# Altium PCB Hobots-A-Coach-405.PcbDoc
Units mm, origin at the board's own origin, x right, y up, seen from the top; angles counter-clockwise.
Board outline 80 x 78 mm, 2 copper layers (Top Layer, Bottom Layer), stack 1.57 mm thick; 62 components, 102 nets, 296 pads, 249 vias.
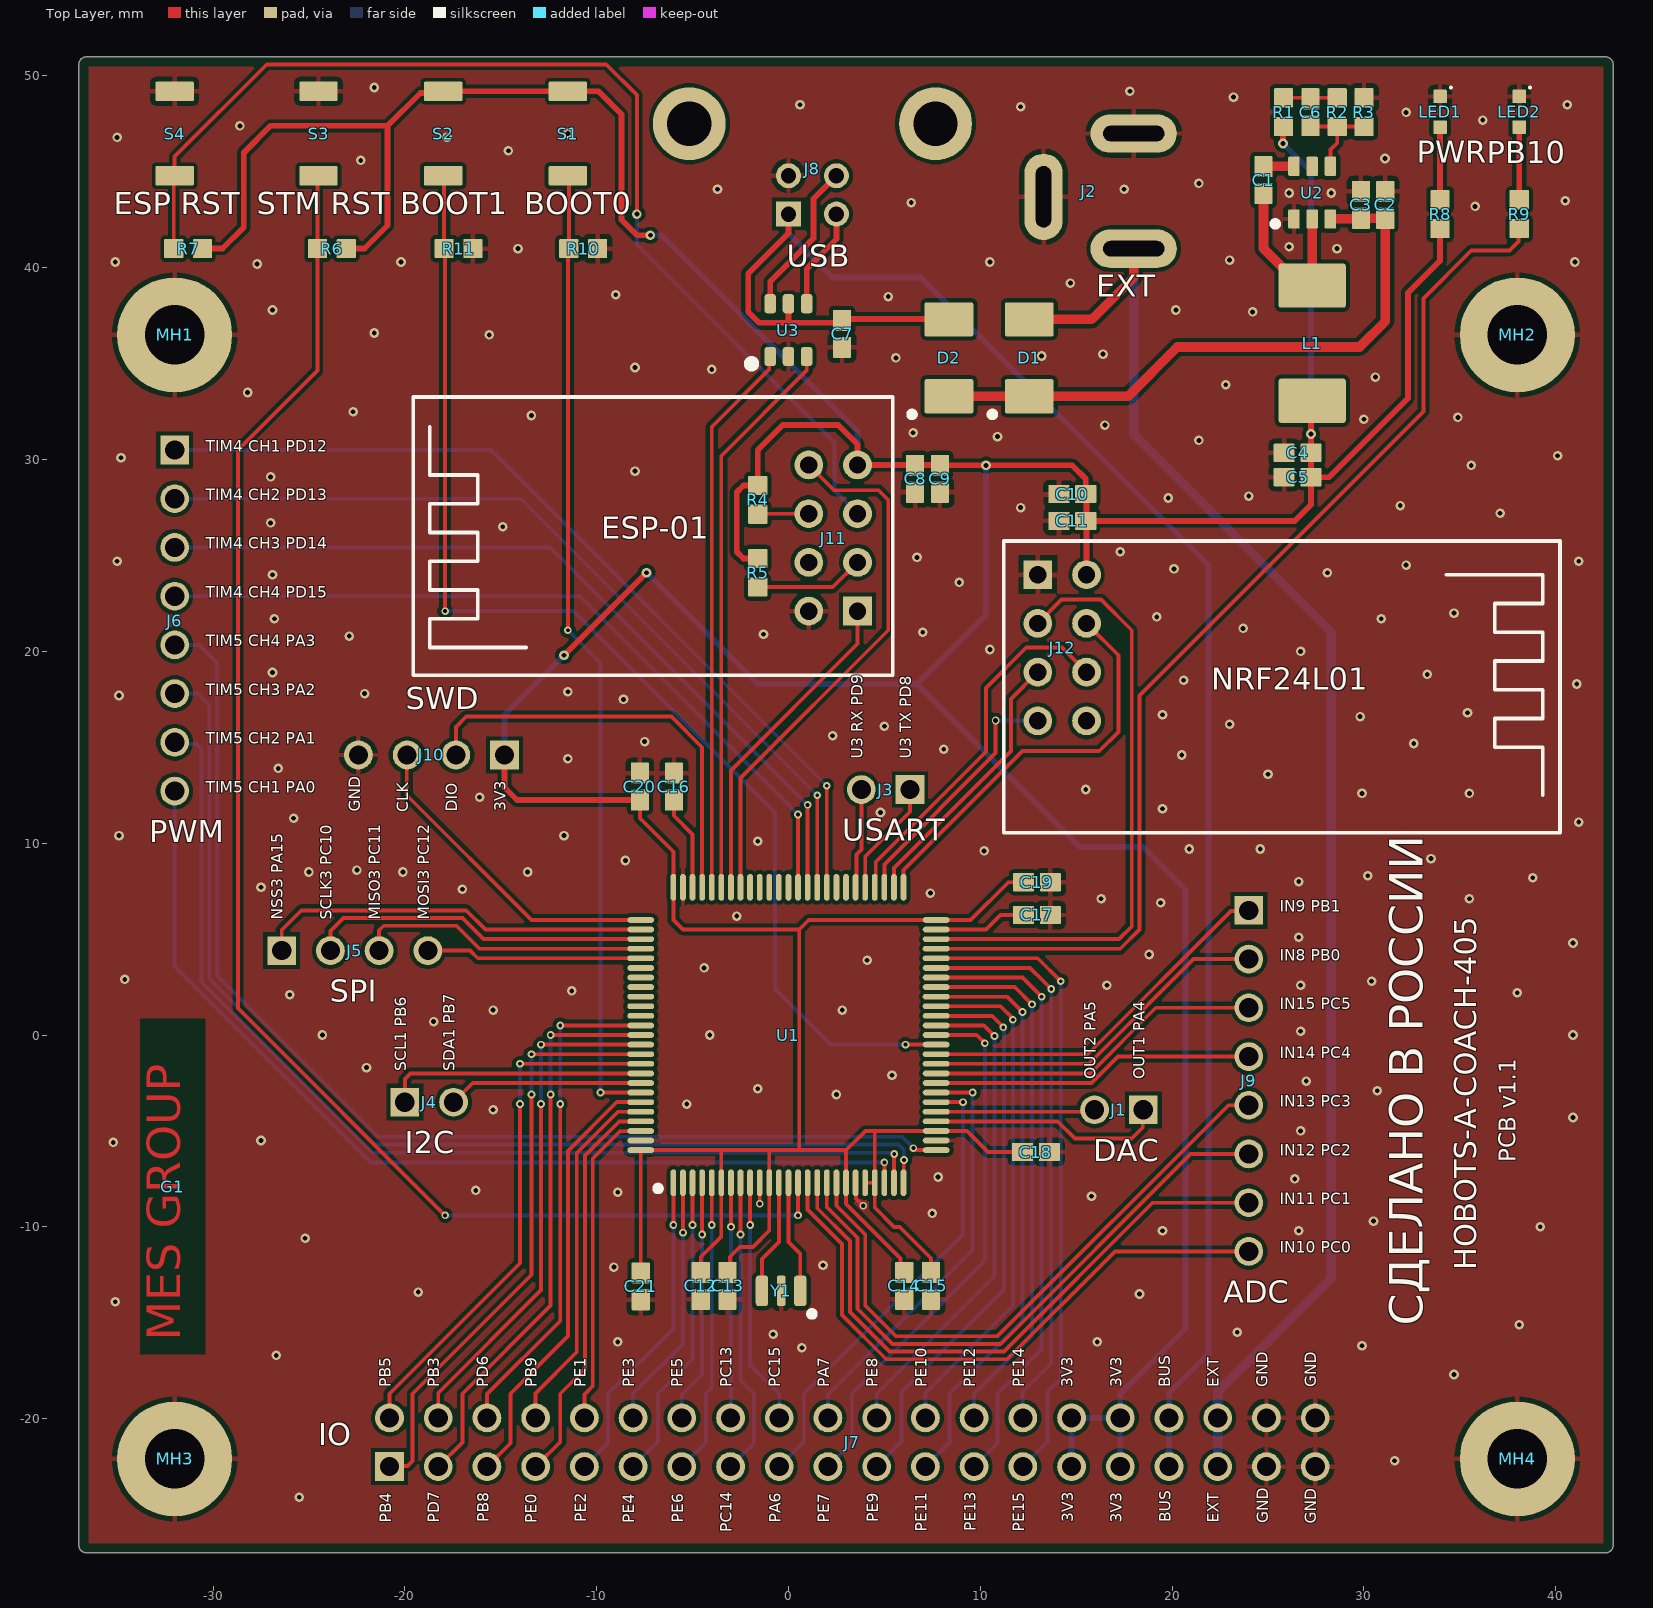
[diagram p0: Top Layer view]
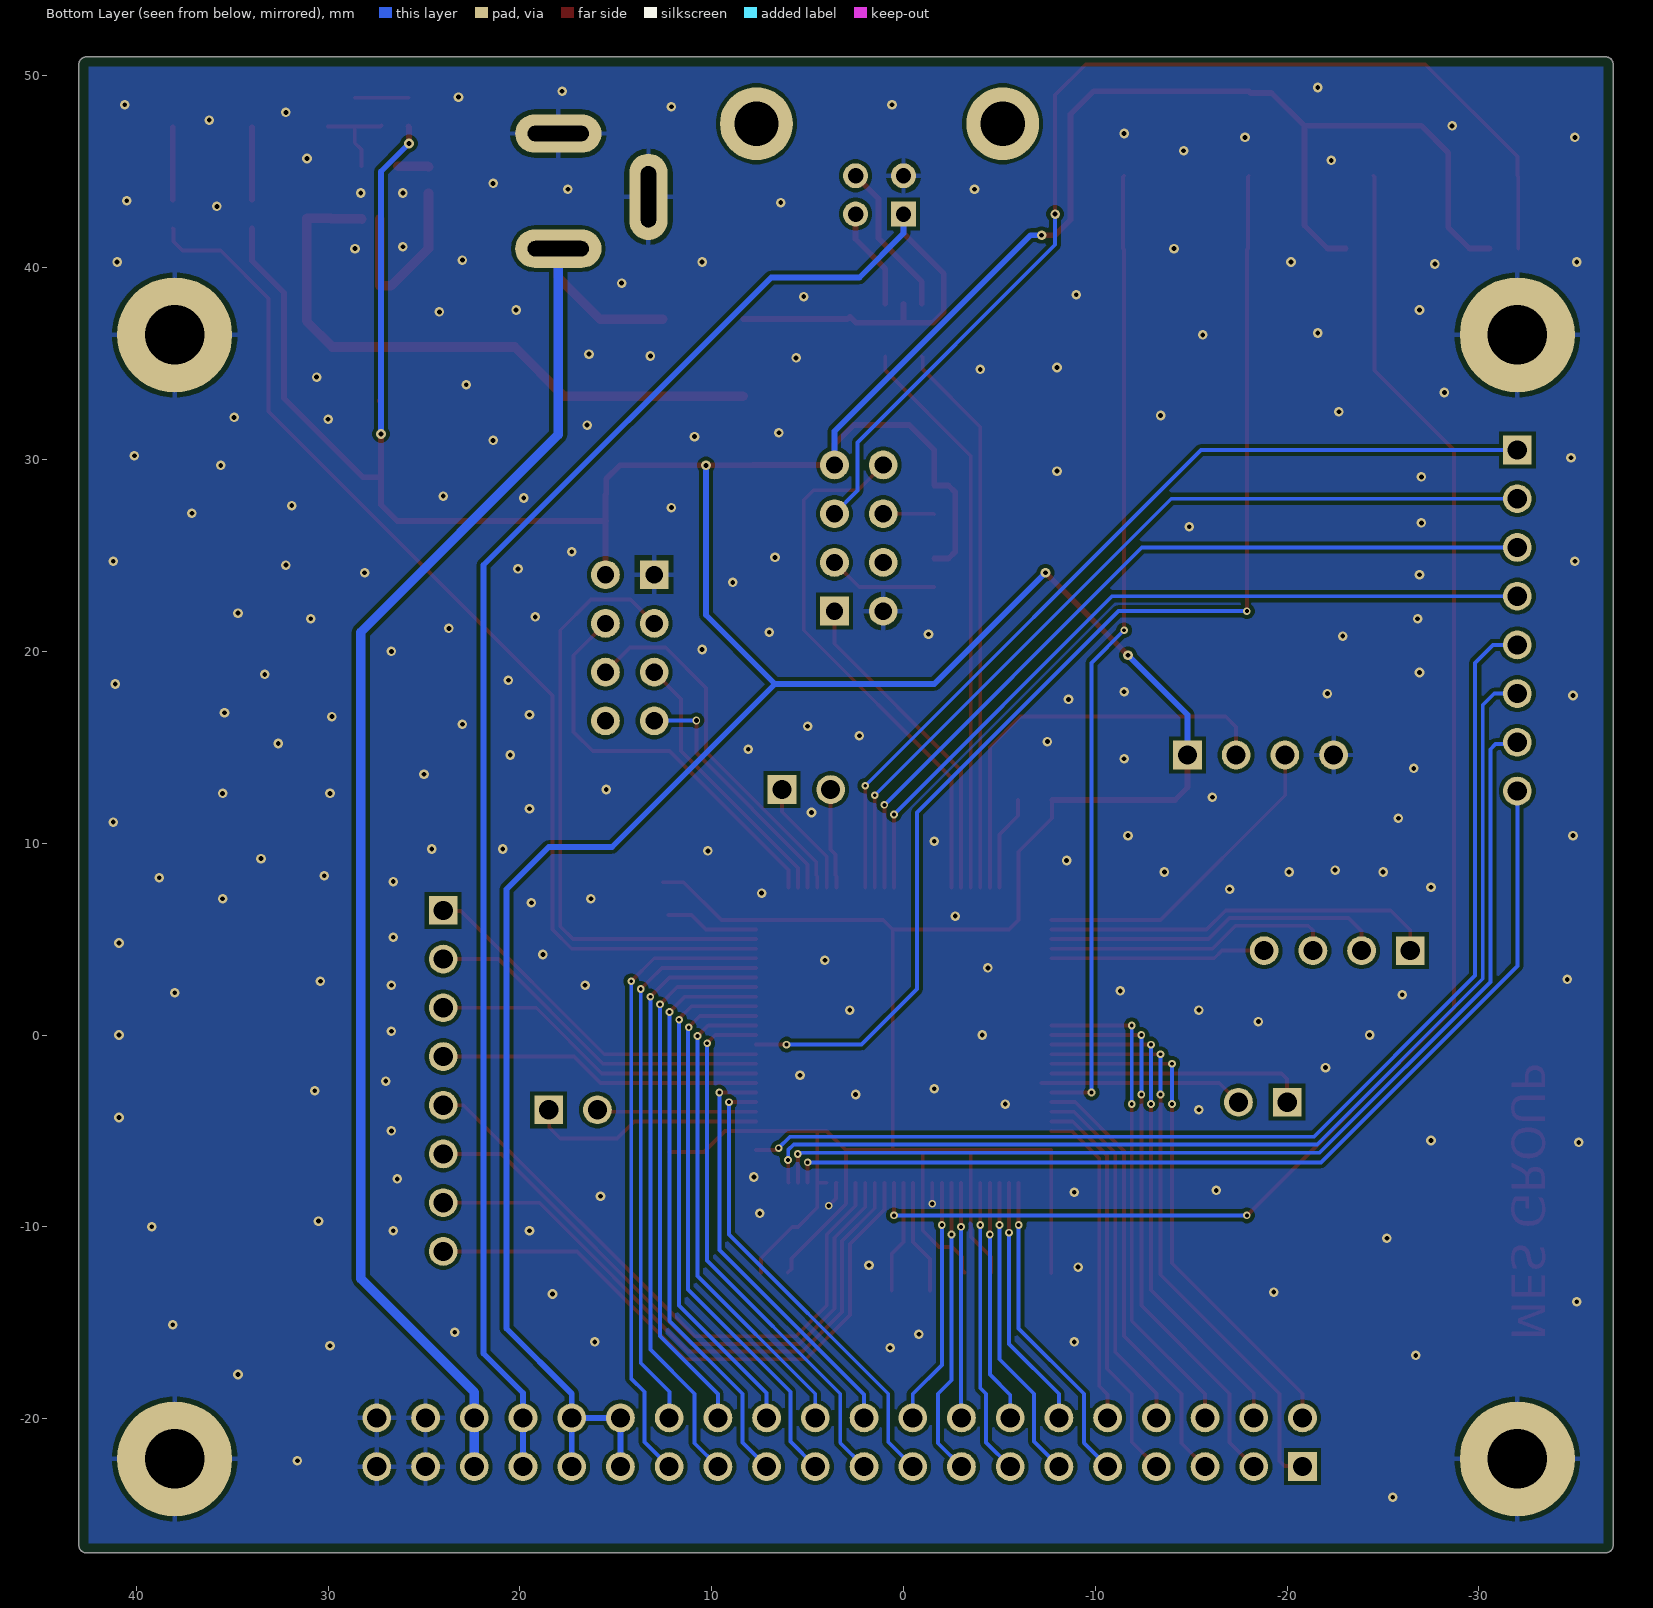
[diagram p1: Bottom Layer view, seen from below]
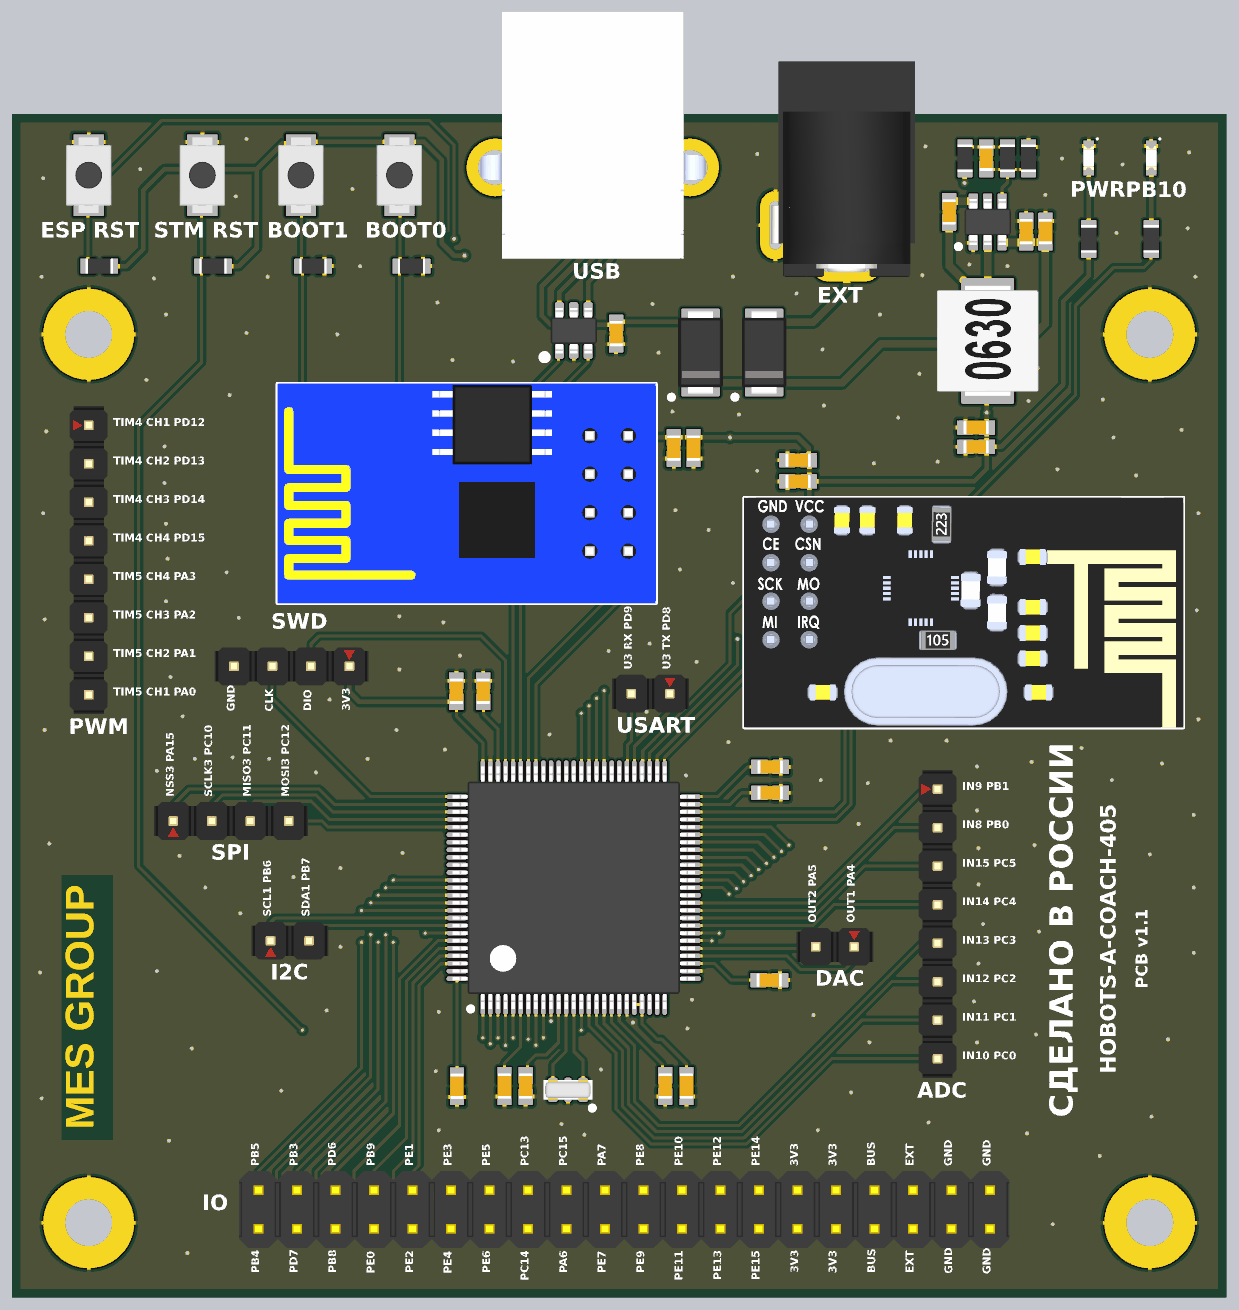
[diagram p2: 3D render of the assembled board from above, using the file's embedded part models]

## Layer stack, top to bottom
Top Solder: solder mask 0.01, Solder Resist, Dk 3.5
Top Layer: signal copper 0.035
Dielectric 1: dielectric 1.5, FR-4, Dk 4.8
Bottom Layer: signal copper 0.035
Bottom Solder: solder mask 0.01, Solder Resist, Dk 3.5

## Board outline
-37,-26.587 -37,50.59 cw(c-36.587,50.59) -36.587,51.002 -36.59,51 42.586,51 cw(c42.586,50.587) 42.999,50.587 43,50.586 43,-26.589 cw(c42.587,-26.589) 42.587,-27.001 42.588,-27 -36.587,-27 cw(c-36.587,-26.587)

## Design rules (kind name [scope] priority, off if disabled: settings)
BoardOutlineClearance [All] p1: gap=0.5 ignorepadtopadclearanceinfootprint=FALSE
Clearance [All] p1: gap=0.2 ignorepadtopadclearanceinfootprint=TRUE
PolygonConnect [All] p1: thpad.connectstyle=Relief thpad.reliefconductorwidth=0.254 thpad.reliefentries=4 thpad.polygonreliefangle="90 Angle" thpad.airgapwidth=0.254 smdpad.connectstyle=Relief smdpad.reliefconductorwidth=0.254 smdpad.reliefentries=4 smdpad.polygonreliefangle="90 Angle" smdpad.airgapwidth=0.254 via.connectstyle=Direct via.reliefconductorwidth=0.254 via.reliefentries=4 via.polygonreliefangle="90 Angle" via.airgapwidth=0.254
RoutingVias [All] p1: holewidth=0.25 width=0.5 viastyle="Through Hole" minholewidth=0.15 minwidth=0.3 maxholewidth=1 maxwidth=2
SolderMaskExpansion [All] p1: expansion=0.102 istentingtop=FALSE
Width [All] p1: maxlimit=1 minlimit=0.2 preferedwidth=0.3
30 further rules are at their usual default settings.

## Classes and differential pairs
component class Hobots-A-Coach-405: C1 C2 C3 C4 C5 C6 C7 C8 C9 C10 C11 C12 C13 C14 C15 C16 C17 C18 C19 C20 C21 D1 D2 G1 J1 J2 J3 J4 J5 J6 J7 J9 J11 L1 LED1 LED2 MH1 MH2 MH3 MH4 R1 R2 R3 R4 R5 R6 R8 S1 S2 S3 S4 U1 U2 U3 Y1

## Components (designator, comment, footprint, x,y, rotation, side; value= is the part's Value field where it differs from the comment)
C1 "CAP-100N" CAPC0603 24.765,44.577 r90 top
C2 "CAP-10U" CAPC0603 31.115,43.282 r270 top
C3 "CAP-100N" CAPC0603 29.845,43.282 r270 top
C4 "CAP-10U" CAPC0603 26.543,30.353 r0 top
C5 "CAP-100N" CAPC0603 26.543,29.083 r0 top
C6 "CAP-56P" CAPC0603 27.211,48.112 r90 top
C7 "CAP-100N" CAPC0603 2.794,36.551 r90 top
C8 "CAP-10U" CAPC0603 6.6,29 r90 top
C9 "CAP-100N" CAPC0603 7.9,29 r90 top
C10 "CAP-10U" CAPC0603 14.8,28.2 r0 top
C11 "CAP-100N" CAPC0603 14.8,26.8 r0 top
C12 "CAP-100N" CAPC0603 -4.572,-13.081 r90 top
C13 "CAP-100N" CAPC0603 -3.175,-13.081 r90 top
C14 "CAP-100N" CAPC0603 6.037,-13.081 r90 top
C15 "CAP-100N" CAPC0603 7.434,-13.081 r90 top
C16 "CAP-2U2" CAPC0603 -5.969,12.954 r270 top
C17 "CAP-2U2" CAPC0603 12.954,6.261 r180 top
C18 "CAP-100N" CAPC0603 12.9,-6.1 r180 top
C19 "CAP-100N" CAPC0603 12.954,7.966 r180 top
C20 "CAP-100N" CAPC0603 -7.747,12.954 r270 top
C21 "CAP-100N" CAPC0603 -7.7,-13.1 r90 top
D1 "SS34" DO-214AC(SMA) 12.557,35.306 r90 top
D2 "SS34" DO-214AC(SMA) 8.366,35.306 r90 top
G1 "MES Logo" MES_LOGO_COPPER_3MM -32.1,-7.9 r90 top
J1 "DAC" PLS-2 18.5,-3.9 r180 top locked
J2 "EXT" KLS1-DC-005 18,41 r0 top locked
J3 "USART" PLS-2 6.34,12.8 r180 top locked
J4 "I2C" PLS-2 -20,-3.5 r0 top locked
J5 "SPI" PLS-4 -26.42,4.4 r0 top locked
J6 "PWM" PLS-8 -32,30.5 r270 top locked
J7 "IO" PLD-40 -20.8,-22.5 r0 top locked
J8 "USB" U241-041N-1BR85-5 0,42.8 r90 top locked
J9 "ADC" PLS-8 24,6.5 r270 top locked
J10 "SWD" PLS-4 -14.8,14.6 r180 top locked
J11 "ESP-01" "ESP-01 Socket" 3.6,22.1 r90 top locked
J12 "NRF24L01" "NRF24L01+ Socket" 13,24 r270 top locked
L1 "AMPLF0630-100" AMPLF0630 27.305,36.068 r90 top
LED1 "PWR" LSM0603-Series 33.971,48.133 r270 top
LED2 "PB10" LSM0603-Series 38.1,48.133 r270 top
MH1 "TH-M3-D6-H3.1" TH-M3-D6-H3.1#1 -34.2,36.2 r0 top
MH2 "TH-M3-D6-H3.1" TH-M3-D6-H3.1#2 38.2,36.3 r0 top
MH3 "TH-M3-D6-H3.1" TH-M3-D6-H3.1#3 -30.2,-21.2 r0 top
MH4 "TH-M3-D6-H3.1" TH-M3-D6-H3.1#4 38.2,-22.1 r0 top
R1 "RES-49R9" RES0603 25.814,48.112 r270 top
R2 "RES-100K" RES0603 28.608,48.112 r90 top
R3 "RES-22K1" RES0603 30.005,48.112 r270 top
R4 "RES-10K" RES0603 -1.6,27.9 r270 top
R5 "RES-10K" RES0603 -1.6,24.1 r90 top
R6 "RES-10K" RES0603 -23.8,41 r0 top
R7 "RES-10K" RES0603 -31.3,41 r0 top
R8 "RES-1K" RES0603 33.971,42.799 r270 top
R9 "RES-1K" RES0603 38.1,42.799 r270 top
R10 "RES-10K" RES0603 -10.7,41 r180 top
R11 "RES-10K" RES0603 -17.2,41 r180 top
S1 "BOOT0" "Tactile Switch SMD 3x4x2-2p" -11.5,47 r90 top locked
S2 "BOOT1" "Tactile Switch SMD 3x4x2-2p" -18,47 r90 top locked
S3 "STM RST" "Tactile Switch SMD 3x4x2-2p" -24.5,47 r270 top locked
S4 "ESP RST" "Tactile Switch SMD 3x4x2-2p" -32,47 r270 top locked
U1 "STM32F405VGT6" LQFP-100-STM32 0,0 r90 top locked
U2 "TPS54202" SOT23-6-TI-TPS54202 27.305,43.917 r90 top
U3 "USBLC6-2SC6" SOT23-6L-STM 0,36.751 r90 top
Y1 "CSTCE8M00G55A-R0" MURATA_3213 -0.381,-13.335 r180 top

## Footprints (in the part's own frame and the unit in brackets; to place one, negate y for a bottom-side part, rotate by r counter-clockwise, add the part's x,y. Pads: shape width x height; smd on the part's side, far side on the other; paste and mask are expansions set on the pad)
AMPLF0630 [mm] "Shielded Large Current Power Inductor"
  rrect10% 2.3x3.5 smd: 1(-3,0) 2(3,0)
  body extent -3.65,-3.35 3.65,3.35, height 3.02
CAPC0603 [mm] "Chip Capacitor, 2-Leads, Body 1,60x0,80mm, IPC Medium Density"
  rrect10% 1.1x0.95 smd: 1(-0.7,0) 2(0.7,0)
  body extent -0.85,-0.45 0.85,0.45, height 0.9
DO-214AC(SMA) [mm]
  rrect10% 1.78x2.54 smd: 1(-2.005,0) 2(2.005,0)
  silkscreen extent -3.1,1.78 -2.8,2.07, body extent -2.8,-1.48 2.8,1.47, height 2.9
"ESP-01 Socket" [mm] "Socket for ESP8266 ESP-01"
  rect 1.5x1.5 hole 0.9: 1(0,0)
  round 1.5 hole 0.9: 2(0,2.54) 3(2.54,0) 4(2.54,2.54) 5(5.08,0) 6(5.08,2.54) 7(7.62,0) 8(7.62,2.54)
  silkscreen extent -3.34,-1.84 11.16,23.16, body extent -3.34,-1.84 11.16,23.16, height 14.4
KLS1-DC-005 [mm]
  oval 4.5x2 hole 0.8 slot 3.2 at 0 deg: 1(0,0) 2(0,6)
  oval 2x4.5 hole 0.8 slot 3.2 at 90 deg: 3(-4.7,2.7)
  body extent -4.95,-0.7 4.5,13.5, height 11
LQFP-100-STM32 [mm] "TSQFP, 100-Leads, Body 14,00x14,00mm, Pitch 0,50mm, IPC Medium Density"
  oval 1.4x0.3 smd: 1(-7.7,6) 2(-7.7,5.5) 3(-7.7,5) 4(-7.7,4.5) 5(-7.7,4) 6(-7.7,3.5) 7(-7.7,3) 8(-7.7,2.5) 9(-7.7,2) 10(-7.7,1.5) 11(-7.7,1) 12(-7.7,0.5) 13(-7.7,0) 14(-7.7,-0.5) 15(-7.7,-1) 16(-7.7,-1.5) 17(-7.7,-2) 18(-7.7,-2.5) 19(-7.7,-3) 20(-7.7,-3.5) 21(-7.7,-4) 22(-7.7,-4.5) 23(-7.7,-5) 24(-7.7,-5.5) 25(-7.7,-6) 51(7.7,-6) 52(7.7,-5.5) 53(7.7,-5) 54(7.7,-4.5) 55(7.7,-4) 56(7.7,-3.5) 57(7.7,-3) 58(7.7,-2.5) 59(7.7,-2) 60(7.7,-1.5) 61(7.7,-1) 62(7.7,-0.5) 63(7.7,0) 64(7.7,0.5) 65(7.7,1) 66(7.7,1.5) 67(7.7,2) 68(7.7,2.5) 69(7.7,3) 70(7.7,3.5) 71(7.7,4) 72(7.7,4.5) 73(7.7,5) 74(7.7,5.5) 75(7.7,6)
  oval 0.3x1.4 smd: 26(-6,-7.7) 27(-5.5,-7.7) 28(-5,-7.7) 29(-4.5,-7.7) 30(-4,-7.7) 31(-3.5,-7.7) 32(-3,-7.7) 33(-2.5,-7.7) 34(-2,-7.7) 35(-1.5,-7.7) 36(-1,-7.7) 37(-0.5,-7.7) 38(0,-7.7) 39(0.5,-7.7) 40(1,-7.7) 41(1.5,-7.7) 42(2,-7.7) 43(2.5,-7.7) 44(3,-7.7) 45(3.5,-7.7) 46(4,-7.7) 47(4.5,-7.7) 48(5,-7.7) 49(5.5,-7.7) 50(6,-7.7) 76(6,7.7) 77(5.5,7.7) 78(5,7.7) 79(4.5,7.7) 80(4,7.7) 81(3.5,7.7) 82(3,7.7) 83(2.5,7.7) 84(2,7.7) 85(1.5,7.7) 86(1,7.7) 87(0.5,7.7) 88(0,7.7) 89(-0.5,7.7) 90(-1,7.7) 91(-1.5,7.7) 92(-2,7.7) 93(-2.5,7.7) 94(-3,7.7) 95(-3.5,7.7) 96(-4,7.7) 97(-4.5,7.7) 98(-5,7.7) 99(-5.5,7.7) 100(-6,7.7)
  silkscreen extent -8.15,6.65 -7.85,6.95, body extent -8,-8 8,8, height 1.6
LSM0603-Series [mm] "LED 0603"
  rrect10% 0.7x0.7 smd: 1(-0.8,0) 2(0.8,0)
  silkscreen extent -1.31,0.51 -1.21,0.61, body extent -0.8,-0.35 0.8,0.35, height 0.7
MES_LOGO_COPPER_3MM [mm] "mes logo. size 3mm. copper layer. text inverted. solder mask open."
MURATA_3213 [mm]
  rrect50% 0.65x1.6 smd: 1(-1,0) 3(1,0)
  rrect50% 0.45x1.6 smd: 2(0,0)
  silkscreen extent -1.75,1.06 -1.45,1.35, body extent -1.6,-0.65 1.6,0.65, height 0.9
"NRF24L01+ Socket" [mm] "Socket for NRF24L01 / NRF24L01+"
  rect 1.5x1.5 hole 0.9: 1(0,0)
  round 1.5 hole 0.9: 2(0,2.54) 3(2.54,0) 4(2.54,2.54) 5(5.08,0) 6(5.08,2.54) 7(7.62,0) 8(7.62,2.54)
  silkscreen extent -1.75,-1.78 13.45,27.22, body extent -1.75,-1.78 13.45,27.22, height 15.95
PLD-40 [mm] "2 row, pitch 2.54mm"
  rect 1.5x1.5 hole 1: 1(0,0)
  round 1.5 hole 1: 2(0,2.54) 3(2.54,0) 4(2.54,2.54) 5(5.08,0) 6(5.08,2.54) 7(7.62,0) 8(7.62,2.54) 9(10.16,0) 10(10.16,2.54) 11(12.7,0) 12(12.7,2.54) 13(15.24,0) 14(15.24,2.54) 15(17.78,0) 16(17.78,2.54) 17(20.32,0) 18(20.32,2.54) 19(22.86,0) 20(22.86,2.54) 21(25.4,0) 22(25.4,2.54) 23(27.94,0) 24(27.94,2.54) 25(30.48,0) 26(30.48,2.54) 27(33.02,0) 28(33.02,2.54) 29(35.56,0) 30(35.56,2.54) 31(38.1,0) 32(38.1,2.54) 33(40.64,0) 34(40.64,2.54) 35(43.18,0) 36(43.18,2.54) 37(45.72,0) 38(45.72,2.54) 39(48.26,0) 40(48.26,2.54)
  body extent -1.27,-1.27 49.53,3.81, height 8.6
PLS-2 [mm] "pitch 2.54mm"
  rect 1.5x1.5 hole 1: 1(0,0)
  round 1.5 hole 1: 2(2.54,0)
  body extent -1.27,-1.25 3.81,1.25, height 8.55
PLS-4 [mm] "pitch 2.54mm"
  rect 1.5x1.5 hole 1: 1(0,0)
  round 1.5 hole 1: 2(2.54,0) 3(5.08,0) 4(7.62,0)
  body extent -1.27,-1.25 8.89,1.25, height 8.55
PLS-8 [mm] "pitch 2.54mm"
  rect 1.5x1.5 hole 1: 1(0,0)
  round 1.5 hole 1: 2(2.54,0) 3(5.08,0) 4(7.62,0) 5(10.16,0) 6(12.7,0) 7(15.24,0) 8(17.78,0)
  body extent -1.27,-1.25 19.05,1.25, height 8.55
RES0603 [mm] "Chip Resistor, 2-Leads, Body 1,60x0,80mm, IPC Medium Density"
  rrect10% 1x1 smd: 1(-0.75,0) 2(0.75,0)
  body extent -0.9,-0.5 0.9,0.5, height 0.55
SOT23-6-TI-TPS54202 [mm] "SOT23, 6-Leads, Body 2,90x2,80mm, Pitch 0,95mm, IPC Medium Density"
  rrect20% 1x0.6 smd: 1(-1.375,0.95) 2(-1.375,0) 3(-1.375,-0.95) 4(1.375,-0.95) 5(1.375,0) 6(1.375,0.95)
  silkscreen extent -1.78,1.78 -1.48,2.08, body extent -1.53,-1.53 1.53,1.53, height 1.1
SOT23-6L-STM [mm] "SOT23, 6-Leads, Body 2,93x2,80mm, Pitch 0,95mm, IPC Medium Density"
  rrect50% 1x0.6 smd: 1(-1.375,0.95) 2(-1.375,0) 3(-1.375,-0.95) 4(1.375,-0.95) 5(1.375,0) 6(1.375,0.95)
  silkscreen extent -1.96,1.73 -1.56,2.13, body extent -1.5,-1.53 1.5,1.53, height 1.45
"Tactile Switch SMD 3x4x2-2p" [mm]
  rrect10% 1x2 smd: 1(-2.2,0) 2(2.2,0)
  body extent -2.5,-1.5 2.5,1.5, height 1.93
TH-M3-D6-H3.1#1 [mm]
  round 6 hole 3.1 unplated: PTH(2.2,0.3)
TH-M3-D6-H3.1#2 [mm]
  round 6 hole 3.1 unplated: PTH(-0.2,0.2)
TH-M3-D6-H3.1#3 [mm]
  round 6 hole 3.1 unplated: PTH(-1.8,-0.9)
TH-M3-D6-H3.1#4 [mm]
  round 6 hole 3.1 unplated: PTH(-0.2,0)
U241-041N-1BR85-5 [mm] "Connector; USB2.0, Type B, Through-Hole; 4 Position; Right Angle"
  rect 1.3x1.3 hole 0.8: 1(0,0)
  round 1.3 hole 0.8: 2(0,-2.5) 3(2,-2.5) 4(2,0)
  round 3.8 hole 2.3: SH1(4.71,-7.67) SH2(4.71,5.17)
  body extent -1.31,-8.7 14.99,6.2, height 11.05

## Part data
C1 C3 C5 C7 C9 C11 C12 C13 C14 C15 C18 C19 C20 C21: "Chip Capacitor, 100 nF, +/- 5%", Capacitance="100 nF", Tolerance="5 %", Voltage Rating="50 V", Mount="Surface Mount", Type=Capacitor
C2 C4 C8 C10: "Chip Capacitor, 10 uF, +/- 5%", Capacitance="10 uF", Tolerance="5 %", Voltage Rating="50 V", Mount="Surface Mount", Type=Capacitor
C6: "Chip Capacitor, 56 pF, +/- 5%", Capacitance="56 pF", Tolerance="5 %", Voltage Rating="50 V", Mount="Surface Mount", Type=Capacitor
C16 C17: "Chip Capacitor, 2.2 uF, +/- 5", Capacitance="2.2 uF", Tolerance="5 %", Voltage Rating="50 V", Mount="Surface Mount", Type=Capacitor
D1 D2: "40V 3A Low forward voltage drop. High current capability Schottky Diode.", Mount="Surface Mount", PartNumber=SS34, Type="Schottky Diode"
G1: "Logotips MES GROUP"
J1 J3 J4: library part PLS-2, "pitch 2.54", Mount="Through Hole", PartNumber=PLS-2, Type=Connector
J2: library part KLS1-DC-005A-2.0, "5.5mm 2.0mm 2A 16V", Mount="Through Hole", PartNumber=KLS1-DC-005A-2.0, Type=Connector
J5: library part PLS-4, "pitch 2.54", Mount="Through Hole", PartNumber=PLS-4, Type=Connector
J6 J9: library part PLS-8, "pitch 2.54", Mount="Through Hole", PartNumber=PLS-8, Type=Connector
J7: library part PLD-40, "2 row, pitch 2.54", Mount="Through Hole", PartNumber=PLD-40, Type=Connector
J8: library part "USB-B U241-041N-1BR85-5", "USB - Type B Female USB 2 4 Through Hole USB Connectors", PartNumber=U241-041N-1BR85-5, Mount="Through Hole", Type=Connector
J10: library part SWD-PLS4, "STM SWD 4 pin", PartNumber=PLS-4, Mount="Through Hole", Type=Connector
J11: library part "ESP-01 Socket", "Socket for ESP8266 ESP-01 Connector PBD 8 pins 2x4 pitch 2.54", Mount="Through Hole", PartNumber=ESP-01, Type=Connector
J12: library part "NRF24L01+ Socket", "Socket for NRF24L01 / NRF24L01+ Connector PBD 8 pins 2x4 pitch 2.54", PartNumber=NRF24L01+, Mount="Through Hole", Type=Connector
L1: "Shielded Power Inductor 10μH ± 20%", DC Current=3.6A, Mount="Surface Mount", PartNumber=AMPLF0630-100, Type=Inductor
LED1: library part LSM0603412V, "Red LED 0603 2V 20mA", Color=Red, Mount="Surface Mount", PartNumber=LSM0603412V, Type=LED
LED2: library part LSM0603453V, "Green LED 0603 3V 20mA", Color=Green, Mount="Surface Mount", PartNumber=LSM0603453V, Type=LED
R1: "Chip Resistor, 49.9 Ohm, +/- 1%", Resistance="49.9 Ohm", Tolerance="1 %", Voltage Rating="50 V", Mount="Surface Mount", Type=Resistor
R2: "Chip Resistor, 100 KOhm, +/- 1%", Resistance="100 KOhm", Tolerance="1 %", Voltage Rating="50 V", Mount="Surface Mount", Type=Resistor
R3: "Chip Resistor, 22.1 KOhm, +/- 1%", Resistance="22.1 KOhm", Tolerance="1 %", Voltage Rating="50 V", Mount="Surface Mount", Type=Resistor
R4 R5 R6 R7 R10 R11: "Chip Resistor, 10 KOhm, +/- 1%", Resistance="10 KOhm", Tolerance="1 %", Voltage Rating="50 V", Mount="Surface Mount", Type=Resistor
R8 R9: "Chip Resistor, 1 KOhm, +/- 1%", Resistance="1 KOhm", Tolerance="1 %", Voltage Rating="50 V", Mount="Surface Mount", Type=Resistor
S1 S2 S3 S4: library part "Tactile Switch 2P 3x4x2", "2-Pin SMD Tactile Switch, sunrom 3x4x2mm 12V DC 0.2A", Model=3x4x2mm-2P, Mount="Surface Mount", Type="Tactile Switch"
U1: "1024 KB Flash 192 RAM 168 MHz ARM based 32-bit MCU", Digit="32 bit", Mount="Surface Mount", PartNumber=STM32F405VGT6, Type=Microcontroller
U2: "4.5-V to 28-V Input, 2-A Output, EMI Friendly / Synchronous Step Down Converter", Package=SOT23-6, Mount="Surface Mount", PartNumber=TPS54202, Type="Step-Down DC-DC"
U3: "Very low capacitance ESD protection  3.5 pF max. USB 2.0 ports up to 480 Mb/s. Ethernet port: 10/100 Mb/s.  SIM card protection", ESD="25 kV", Mount="Surface Mount", PartNumber=USBLC6-2SC6, Type="TVS Diode"
Y1: "8MHz ±0.5% 33pF 40 Ohm(Max) SMDCrystal Resonators", Frequency=8MHz, LoadCapacitance="33 pF", Mount="Surface Mount", PartNumber=CSTCE8M00G55A-R0, Type="Quartz Crystal Resonator"

## Via types
v1: diameter 0.5, hole 0.25, Top Layer to Bottom Layer, tented both sides, 203 vias
v2: diameter 0.4, hole 0.2, Top Layer to Bottom Layer, tented both sides, 43 vias
v3: diameter 0.4, hole 0.25, Top Layer to Bottom Layer, tented both sides, 3 vias

## Nets (pads, with @x,y where several pads share a name; then routed paths per layer and width w, separated by ;. In a path a pad name is that pad's centre, name@x,y a point inside that pad or via, vN(x,y) a via of type N, cw(c..) or ccw(c..) an arc to the next point about the centre after c; other vN are vias at no path point)
ESP_RST: J11.5 R7.1 S4.2 | length 58.2
  Top Layer w0.2: R7.1 -32.05,44.75 S4.2 -32,45.8 -27.2,50.6 -9.5,50.6 -7.9,49 v1(-7.9,42.8)
  Bottom Layer w0.2: v1(-7.9,42.8) -7.9,41.2 2.4,30.9 2.4,28.38 J11.5
GND: C2.1 C3.1 C4.1 C5.1 C7.1 C8.1 C9.1 C10.1 C11.1 C12.1 C13.1 C14.1 C15.1 C16.1 C17.1 C18.1 C19.1 C20.1 C21.1 J2.2 J2.3 J7.37 J7.38 J7.39 J7.40 J8.4 J10.4 J11.2 J12.1 LED1.1 LED2.1 MH1.PTH MH2.PTH MH3.PTH MH4.PTH R3.1 R10.1 R11.1 S3.1 S4.1 U1.10 U1.20 U1.27 U1.74 U1.99 U2.1 U3.2 Y1.2 | length 2.5
  Top Layer w0.2: v3(-1.5,-8.8) U1.10 ; U1.20 3.519,-7.719 3.519,-8.519 v3(3.9,-8.9)
  other v1: -25.5,-24.1 31.6,-22.2 34.7,-17.7 -26.7,-16.7 0.7,-16.3 29.9,-16.2 -8.9,-16 16.1,-16 -0.8,-15.6 23.4,-15.5 38.1,-15.1 -35.1,-13.9 18.3,-13.5 -19.3,-13.4 -9.1,-12.1 1.8,-12 -25.2,-10.6 19.5,-10.2 26.6,-10.2 39.2,-10 30.5,-9.7 7.5,-9.3 15.8,-8.4 -8.9,-8.2 -16.3,-8.1 26.4,-7.5 7.8,-7.4 -35.2,-5.6 -27.5,-5.5 26.7,-5 40.9,-4.3 -15.4,-3.9 -5.3,-3.6 2.5,-3.1 30.7,-2.9 -1.6,-2.8 27,-2.4 5.4,-2.1 -22,-1.7 -24.3,0 -4.1,0 40.9,0 26.7,0.2 -18.5,0.7 -15.4,1.3 2.8,1.3 -26,2.1 38,2.2 -11.3,2.3 16.6,2.6 26.7,2.6 30.4,2.8 -34.6,2.9 -4.4,3.5 4.1,3.9 18.8,4.2 40.9,4.8 26.6,5.1 -2.7,6.2 19.4,6.9 16.3,7.1 35.5,7.1 7.4,7.4 -17,7.6 -27.5,7.7 26.6,8 38.8,8.2 30.2,8.3 -25,8.5 -20.1,8.5 -13.6,8.5 -22.5,8.6 -8.5,9.1 33.5,9.2 10.2,9.6 20.9,9.7 24.6,9.7 -1.6,10.1 -34.9,10.4 -11.7,10.4 41.2,11.1 -25.8,11.3 4.8,11.6 19.5,11.8 -16.1,12.4 29.9,12.6 35.5,12.6 15.5,12.8 25,13.6 -26.6,13.9 -11.5,14.4 20.5,14.6 8.1,14.9 32.6,15.2 -7.5,15.3 2.3,15.6 5,16.1 23,16.2 29.8,16.6 19.5,16.7 35.4,16.8 -8.6,17.5 -34.9,17.7 -22.1,17.8 -11.5,17.9 41.1,18.3 20.6,18.5 33.3,18.8 -26.9,18.9 26.7,20 10.5,20.1 -22.9,20.8 -1.3,20.9 7,21 23.7,21.2 -26.8,21.7 30.9,21.7 19.2,21.8 34.7,22 8.9,23.6 -26.9,24 28.1,24.1 20.1,24.3 32.2,24.5 -35,24.7 41.2,24.7 6.7,24.9 17.3,25.2 -14.9,26.5 -27,26.7 37.1,27.2 12.1,27.5 31.9,27.6 19.8,28 24,28.1 -27,29.1 -8,29.4 35.6,29.7 -34.8,30.1 40.1,30.2 21.4,31 10.9,31.2 6.5,31.4 16.5,31.8 30,32.1 34.9,32.2 -13.4,32.3 -22.7,32.5 -28.2,33.5 22.8,33.9 30.6,34.3 -4,34.7 -8,34.8 5.6,35.3 13.2,35.4 16.4,35.5 -15.6,36.5 -21.6,36.6 24.2,37.7 -26.9,37.8 20.2,37.8 5.2,38.5 -9,38.6 14.7,39.2 -27.7,40.2 -35.1,40.3 -20.2,40.3 10.5,40.3 41,40.3 23,40.4 -14.1,41 28.6,41 26.1,41.1 35.8,43.2 6.4,43.4 40.5,43.5 26.1,43.9 28.3,43.9 -3.7,44.1 17.5,44.1 21.4,44.4 -22.3,45.6 31.1,45.7 -14.6,46.1 -35,46.8 -17.8,46.8 -11.5,47 -28.6,47.4 36.2,47.7 32.2,48.1 12.1,48.4 0.6,48.5 40.6,48.5 23.2,48.9 17.8,49.2 -21.6,49.4
NetC6_2: C6.2 R1.1 R2.2 | length 2.8
  Top Layer w0.2: R1.1 R2.2
NetJ11_3: J11.3 R5.1 | length 5.7
  Top Layer w0.2: R5.1 2.31,23.35 J11.3
NetJ11_6: J11.6 R4.2 | length 2.7
  Top Layer w0.2: R4.2 -1.57,27.18 J11.6
NetLED1_2: LED1.2 R8.1 | length 3.8
  Top Layer w0.3: R8.1 LED1.2
NetLED2_2: LED2.2 R9.1 | length 3.8
  Top Layer w0.3: R9.1 LED2.2
PP_3V3: C4.2 C5.2 C8.2 C9.2 C10.2 C11.2 C12.2 C13.2 C14.2 C15.2 C18.2 C19.2 C20.2 C21.2 J7.29 J7.30 J7.31 J7.32 J10.1 J11.7 J12.2 L1.1 R1.2 R4.1 R5.2 R6.2 R7.2 R8.2 S1.2 S2.2 U1.6 U1.11 U1.19 U1.21 U1.22 U1.28 U1.50 U1.75 U1.100 | length 345.2
  Top Layer w0.2: C20.2 -7.747,11.303 -6,9.556 U1.75 -6,6 -5.5,5.5 0.561,5.5 ; C21.2 U1.100 -3.5,-6 ; C12.2 -4.572,-11.572 -3.5,-10.5 U1.6 -3.5,-6 ; C13.2 -3.048,-12.254 -3.048,-11.557 -2.536,-11.045 -1.845,-11.045 -1,-10.2 U1.11 -1,-6 ; U1.21 U1.22 ; C14.2 5.848,-12.192 5.848,-11.648 3,-8.8 U1.19 3,-6.017 3.017,-6 ; C15.2 7.434,-11.634 5.8,-10 5.5,-10 4.5,-9 U1.22 ; C18.2 10.4,-6.1 9.3,-5 U1.28 4.546,-5 ; C19.2@12.54,7.966 C19.2 11.466,7.966 9.5,6 U1.50 1.061,6 0.561,5.5 ; -3.5,-6 -1,-6 ; -1,-6 0.561,-6 ; 0.561,-6 3.017,-6 ; 0.561,-6 0.561,5.5 ; 3.017,-6 4.017,-5 4.546,-5 ; U1.22 4.5,-5.046 4.546,-5
  Top Layer w0.3: R7.2 -29.5,41 -28.4,42.1 -28.4,46 -27,47.4 -20.9,47.4 ; R6.2 -22.1,41 -20.9,42.2 -20.9,47.4 ; J10.1 -14.8,12.9 -14.154,12.254 C20.2 ; v1(-11.7,19.8) v1(-7.4,24.1) ; v1(-7.2,41.7) -7.9,41.7 -8.7,42.5 -8.7,48 -9.9,49.2 S1.2 S2.2 -18.083,49.117 -19.183,49.117 -20.9,47.4 ; R5.2 -2.35,24.85 -2.7,25.2 -2.7,28.3 -2.35,28.65 R4.1 -1.6,30.5 -0.3,31.8 2.6,31.8 3.6,30.8 J11.7 7.88,29.72 C9.2 v1(10.3,29.7) 14.8,29.7 15.5,29 C10.2 15.54,28.16 C11.2@15.54,26.8 ; C11.2 C11.2@15.54,26.8 ; J12.2 C11.2@15.54,26.8 ; v1(25.781,46.482) 25.781,47.328 R1.2 ; L1.1 27.243,33.006 v1(27.243,31.334) C4.2 C5.2 ; R8.2 33.971,40.371 32.3,38.7 32.3,33.2 28.183,29.083 C5.2 ; C11.2@15.54,26.8 26.4,26.8 27.243,27.643 C5.2
  Bottom Layer w0.3: J10.1 -14.8,16.7 v1(-11.7,19.8) ; v1(-7.4,24.1) -1.6,18.3 6.7,18.3 ; v1(-7.2,41.7) -6.624,41.7 3.6,31.476 J11.7 ; v1(10.3,29.7) 10.3,21.9 6.7,18.3 ; J7.29 J7.30 J7.32 ; J7.31 J7.32 ; v1(25.781,46.482) 27.243,45.02 v1(27.243,31.334) ; 6.7,18.3 15.2,9.8 18.5,9.8 20.7,7.6 20.7,-15.3 17.3,-18.7 J7.32
PP_EXT_IN: D1.2 J2.1 J7.35 J7.36 | length 78.1
  Top Layer w0.5: D1.2 15.811,37.311 18,39.5 J2.1
  Bottom Layer w0.5: J2.1 18,31.3 28.3,21 28.3,-12.7 22.38,-18.62 J7.35
PP_VBUS: C7.2 D2.2 J7.33 J7.34 J8.1 U3.5 | length 95.8
  Top Layer w0.3: U3.5 0,37.132 ; J8.1 0,41.8 -2.1,39.7 -2.1,37.7 -1.532,37.132 0,37.132 ; D2.2@8.357,37.311 8.344,37.324 2.921,37.324 2.794,37.451 2.475,37.132 0,37.132
  Bottom Layer w0.3: J8.1 0,41.8 2.3,39.5 6.9,39.5 21.9,24.5 21.9,-16.6 19.84,-18.66 J7.34 J7.33
PP_VCC_IN: C2.2 C3.2 D1.1 D2.1 U2.3 | length 32.6
  Top Layer w0.5: D2.1 D1.1 17.701,33.301 20.27,35.87 29.774,35.87 31.115,37.211 C2.2 C3.2 29.825,42.562 28.275,42.562 U2.3
STM_ADC12_IN8_PB0: J9.2 U1.35 | length 18.6
  Top Layer w0.2: U1.35 15.666,-1.5 21.126,3.96 J9.2
STM_ADC12_IN9_PB1: J9.1 U1.36 | length 19.4
  Top Layer w0.2: U1.36 15.6,-1 23.067,6.467 23.967,6.467 J9.1
STM_ADC12_IN14_PC4: J9.4 U1.33 | length 16.9
  Top Layer w0.2: U1.33 15.8,-2.5 17.18,-1.12 J9.4
STM_ADC12_IN15_PC5: J9.3 U1.34 | length 17.7
  Top Layer w0.2: U1.34 15.731,-2 19.151,1.42 J9.3
STM_ADC123_IN10_PC0: J9.8 U1.15 | length 32.1
  Top Layer w0.2: U1.15 1,-9.1 2.8,-10.9 2.8,-14.6 5.1,-16.9 11.4,-16.9 17.02,-11.28 J9.8
STM_ADC123_IN11_PC1: J9.7 U1.16 | length 32.3
  Top Layer w0.2: U1.16 1.5,-9.034 3.2,-10.734 3.2,-14.434 5.266,-16.5 11.234,-16.5 18.994,-8.74 J9.7
STM_ADC123_IN12_PC2: J9.6 U1.17 | length 32.5
  Top Layer w0.2: U1.17 2,-8.969 3.6,-10.569 3.6,-14.269 5.431,-16.1 11.069,-16.1 20.969,-6.2 J9.6
STM_ADC123_IN13_PC3: J9.5 U1.18 | length 32.7
  Top Layer w0.2: U1.18 2.5,-8.903 4,-10.403 4,-14.103 5.597,-15.7 10.9,-15.7 22.94,-3.66 J9.5
STM_BOOT0: R10.2 S1.1 U1.94 | length 50.6
  Top Layer w0.2: v2(-11.5,21.1) -11.5,40.95 R10.2 -11.45,44.75 S1.1 ; v2(-9.8,-3) U1.94
  Bottom Layer w0.2: v2(-11.5,21.1) -9.8,19.4 v2(-9.8,-3)
STM_DAC_OUT1_PA4: J1.1 U1.29 | length 12.3
  Top Layer w0.2: U1.29 14.04,-4.5 14.94,-5.4 17.9,-5.4 18.467,-4.833 18.467,-3.933 J1.1
STM_DAC_OUT2_PA5: J1.2 U1.30 | length 8.3
  Top Layer w0.2: U1.30 15.86,-4 J1.2
STM_I2C1_SCL_PB6: J4.1 U1.92 | length 13.6
  Top Layer w0.2: J4.1 -20,-2.3 -19.7,-2 U1.92
STM_I2C1_SDA_PB7: J4.2 U1.93 | length 10.7
  Top Layer w0.2: J4.2 -16.46,-2.5 U1.93 U1.93@-7.2,-2.5
STM_NRF_CE_PB11: J12.3 U1.48 | length 32
  Top Layer w0.2: U1.48 17.234,5 17.9,5.666 17.9,21.1 16.3,22.7 14.24,22.7 J12.3
STM_NRST: R6.1 S3.2 U1.14 | length 80.5
  Top Layer w0.2: S3.2 -24.55,44.75 R6.1 -24.55,34.65 -28.7,30.5 -28.7,1.4 v2(-17.9,-9.4) ; v2(0.5,-9.4) U1.14
  Bottom Layer w0.2: v2(-17.9,-9.4) v2(0.5,-9.4)
STM_OSC_IN_PH0: U1.12 Y1.3 | length 6
  Top Layer w0.2: Y1.3 -1.381,-11.668 -0.5,-10.787 U1.12
STM_OSC_OUT_PH1: U1.13 Y1.1 | length 5.9
  Top Layer w0.2: U1.13 0,-10.795 0.619,-11.414 Y1.1
STM_PA6: J7.17 U1.31 | length 24.4
  Top Layer w0.2: U1.31 v2(9.1,-3.5)
  Bottom Layer w0.2: J7.17 0.8,-21.22 0.8,-18.7 9.1,-10.4 v2(9.1,-3.5)
STM_PA7: J7.20 U1.32 | length 22
  Top Layer w0.2: U1.32 v2(9.6,-3)
  Bottom Layer w0.2: J7.20 2.06,-18.74 9.6,-11.2 v2(9.6,-3)
STM_PA8: U1.67
STM_PB2_BOOT1: R11.2 S2.1 U1.37 | length 63.1
  Top Layer w0.2: S2.1 -17.95,44.75 R11.2 -17.9,40.95 v2(-17.9,22.1) ; v2(6.1,-0.5) U1.37
  Bottom Layer w0.2: v2(-17.9,22.1) -11.2,22.1 -0.7,11.6 -0.7,2.4 2.2,-0.5 v2(6.1,-0.5)
STM_PB3: J7.4 U1.89 | length 26.9
  Top Layer w0.2: J7.4 -18.26,-18.66 -12.9,-13.3 v2(-12.9,-3.6) ; v2(-12.9,-0.5) U1.89
  Bottom Layer w0.2: v2(-12.9,-3.6) v2(-12.9,-0.5)
STM_PB4: J7.1 U1.90 | length 30.8
  Top Layer w0.2: J7.1 -20.767,-22.467 -19.867,-22.467 -19.6,-22.2 -19.6,-18.7 -13.4,-12.5 v2(-13.4,-3.1) ; v2(-13.4,-1) U1.90
  Bottom Layer w0.2: v2(-13.4,-3.1) v2(-13.4,-1)
STM_PB5: J7.2 U1.91 | length 27.6
  Top Layer w0.2: J7.2 -20.8,-18.7 -14,-11.9 v2(-14,-3.6) ; v2(-14,-1.5) U1.91
  Bottom Layer w0.2: v2(-14,-3.6) v2(-14,-1.5)
STM_PB8: J7.5 U1.95 | length 23.1
  Top Layer w0.2: J7.5 -14.5,-21.28 -14.5,-18.7 -11.5,-15.7 -11.5,-6.047 -8.953,-3.5 U1.95
STM_PB9: J7.8 U1.96 | length 18.9
  Top Layer w0.2: J7.8 -13.18,-18.68 -11.034,-16.534 -11.034,-6.146 -8.888,-4 U1.96
STM_PB10: R9.2 U1.47 | length 56.9
  Top Layer w0.2: U1.47 17.3,4.5 18.3,5.5 18.3,17.7 33.1,32.5 33.1,38.4 35.6,40.9 37.6,40.9 38.066,41.366 38.066,42.015 R9.2
STM_PC6: U1.63
STM_PC7: U1.64
STM_PC8: U1.65
STM_PC9: U1.66
STM_PC13: J7.16 U1.7 | length 12.3
  Top Layer w0.2: v2(-3,-10) U1.7
  Bottom Layer w0.2: J7.16 -3,-19.94 v2(-3,-10)
STM_PC14: J7.15 U1.8 | length 15.6
  Top Layer w0.2: v2(-2.5,-10.4) U1.8
  Bottom Layer w0.2: J7.15 -1.8,-21.28 -1.8,-18.7 -2.5,-18 v2(-2.5,-10.4)
STM_PC15: J7.18 U1.9 | length 12.9
  Top Layer w0.2: v2(-2,-9.9) U1.9
  Bottom Layer w0.2: v2(-2,-9.9) -2,-17.2 -0.48,-18.72 J7.18
STM_PD0: U1.81
STM_PD1: U1.82
STM_PD2: U1.83
STM_PD3: U1.84
STM_PD4: U1.85
STM_PD5: U1.86
STM_PD6: J7.6 U1.87 | length 26.2
  Top Layer w0.2: J7.6 -15.72,-18.72 -11.9,-14.9 v2(-11.9,-3.6) ; v2(-11.9,0.5) U1.87
  Bottom Layer w0.2: v2(-11.9,-3.6) v2(-11.9,0.5)
STM_PD7: J7.3 U1.88 | length 29.6
  Top Layer w0.2: J7.3 -17,-21.24 -17,-18.7 -12.4,-14.1 v2(-12.4,-3.1) ; v2(-12.4,0) U1.88
  Bottom Layer w0.2: v2(-12.4,-3.1) v2(-12.4,0)
STM_PD10: U1.57
STM_PD11: U1.58
STM_PE0: J7.7 U1.97 | length 20.9
  Top Layer w0.2: J7.7 -11.9,-21.22 -11.9,-18.7 -10.6,-17.4 -10.6,-6.278 -8.822,-4.5 U1.97
STM_PE1: J7.10 U1.98 | length 16.8
  Top Layer w0.2: J7.10 -10.64,-18.74 -10.2,-18.3 -10.2,-6.444 -8.775,-5.019 -7.719,-5.019 U1.98
STM_PE2: J7.9 U1.1 | length 16.7
  Top Layer w0.2: v2(-6,-9.9) U1.1
  Bottom Layer w0.2: J7.9 -9.4,-21.26 -9.4,-18.7 -6,-15.3 v2(-6,-9.9)
STM_PE3: J7.12 U1.2 | length 13.3
  Top Layer w0.2: v2(-5.5,-10.3) U1.2
  Bottom Layer w0.2: J7.12 -8.1,-18.7 -5.5,-16.1 v2(-5.5,-10.3)
STM_PE4: J7.11 U1.3 | length 16.1
  Top Layer w0.2: v2(-5,-9.9) U1.3
  Bottom Layer w0.2: J7.11 -6.8,-21.2 -6.8,-18.7 -5,-16.9 v2(-5,-9.9)
STM_PE5: J7.14 U1.4 | length 12.7
  Top Layer w0.2: v2(-4.5,-10.4) U1.4
  Bottom Layer w0.2: J7.14 -5.56,-18.76 -4.5,-17.7 v2(-4.5,-10.4)
STM_PE6: J7.13 U1.5 | length 15.4
  Top Layer w0.2: v2(-4,-9.9) U1.5
  Bottom Layer w0.2: J7.13 -4.3,-21.24 -4.3,-18.7 -4,-18.4 v2(-4,-9.9)
STM_PE7: J7.19 U1.38 | length 28.2
  Top Layer w0.2: U1.38 9.815,0 v2(10.238,-0.425) v2(10.238,-0.425)
  Bottom Layer w0.2: J7.19 3.3,-21.26 3.3,-18.7 10.238,-11.762 v2(10.238,-0.425)
STM_PE8: J7.22 U1.39 | length 25.7
  Top Layer w0.2: U1.39 10.186,0.5 v2(10.738,-0.053)
  Bottom Layer w0.2: J7.22 4.6,-18.7 10.738,-12.562 v2(10.738,-0.053)
STM_PE9: J7.21 U1.40 | length 29.4
  Top Layer w0.2: U1.40 10.623,1 11.2,0.423 v2(11.2,0.4)
  Bottom Layer w0.2: J7.21 5.9,-21.2 5.9,-18.6 11.238,-13.262 11.238,0.362 v2(11.2,0.4)
STM_PE10: J7.24 U1.41 | length 27
  Top Layer w0.2: U1.41 11.054,1.5 11.7,0.854 v2(11.7,0.8)
  Bottom Layer w0.2: J7.24 7.14,-18.66 11.7,-14.1 v2(11.7,0.8)
STM_PE11: J7.23 U1.42 | length 30.6
  Top Layer w0.2: U1.42 11.4,2 v2(12.2,1.2)
  Bottom Layer w0.2: J7.23 8.4,-21.24 8.4,-18.7 12.2,-14.9 v2(12.2,1.2)
STM_PE12: J7.26 U1.43 | length 28.2
  Top Layer w0.2: U1.43 11.8,2.5 v2(12.7,1.6)
  Bottom Layer w0.2: J7.26 9.68,-18.72 12.7,-15.7 v2(12.7,1.6)
STM_PE13: J7.25 U1.44 | length 31.9
  Top Layer w0.2: U1.44 12.2,3 v2(13.2,2)
  Bottom Layer w0.2: J7.25 10.9,-21.28 10.9,-18.7 13.2,-16.4 v2(13.2,2)
STM_PE14: J7.28 U1.45 | length 29.4
  Top Layer w0.2: U1.45 12.6,3.5 13.281,2.819 v2(13.7,2.4)
  Bottom Layer w0.2: J7.28@12.2,-19.96 12.2,-18.6 13.7,-17.1 v2(13.7,2.4)
STM_PE15: J7.27 U1.46 | length 33.1
  Top Layer w0.2: U1.46 13,4 v2(14.2,2.8)
  Bottom Layer w0.2: J7.27 13.5,-21.22 13.5,-18.6 14.2,-17.9 v2(14.2,2.8)
STM_SPI2_MISO_PB14: J12.7 U1.53 | length 13.3
  Top Layer w0.2: U1.53 5,8.9 10.8,14.7 v3(10.8,16.4)
  Bottom Layer w0.2: v3(10.8,16.4) 10.81,16.39 12.99,16.39 J12.7
STM_SPI2_MOSI_PB15: J12.6 U1.54 | length 19.4
  Top Layer w0.2: U1.54 4.5,8.277 4.55,8.327 4.55,9.016 10.3,14.766 10.3,18.1 12.4,20.2 14.26,20.2 J12.6
STM_SPI2_NSS_PB12: J12.4 U1.51 | length 21.4
  Top Layer w0.2: U1.51 6,8.6 12.2,14.8 16.2,14.8 17.2,15.8 17.2,19.8 J12.4
STM_SPI2_SCLK_PB13: J12.5 U1.52 | length 14.3
  Top Layer w0.2: U1.52 5.5,8.7 11.6,14.8 11.6,17.52 J12.5
STM_SPI3_MISO_PC11: J5.3 U1.79 | length 15.3
  Top Layer w0.2: J5.3 -21.34,5.46 -21.1,5.7 -17.3,5.7 -16.1,4.5 U1.79
STM_SPI3_MOSI_PC12: J5.4 U1.80 | length 11.3
  Top Layer w0.2: J5.4 -16.6,4.4 -16.2,4 U1.80
STM_SPI3_NSS_PA15: J5.1 U1.77 | length 20.6
  Top Layer w0.2: J5.1 -26.42,5.48 -25.4,6.5 -16.8,6.5 -15.8,5.5 U1.77
STM_SPI3_SCLK_PC10: J5.2 U1.78 | length 17.9
  Top Layer w0.2: J5.2 -23.88,5.42 -23.2,6.1 -17,6.1 -15.9,5 U1.78
STM_SWCLK_PA14: J10.3 U1.76 | length 17
  Top Layer w0.2: J10.3@-19.9,14.6 -19.9,12.5 -13.4,6 U1.76
STM_SWDIO_PA13: J10.2 U1.72 | length 22.5
  Top Layer w0.2: J10.2 -17.34,16.06 -16.8,16.6 -6.1,16.6 -4.5,15 U1.72
STM_TIM4_CH1_PD12: J6.1 U1.59 | length 46.5
  Top Layer w0.2: U1.59 v2(2,13)
  Bottom Layer w0.2: J6.1 -15.5,30.5 v2(2,13)
STM_TIM4_CH2_PD13: J6.2 U1.60 | length 44.7
  Top Layer w0.2: U1.60 v2(1.5,12.5)
  Bottom Layer w0.2: J6.2 -13.96,27.96 v2(1.5,12.5)
STM_TIM4_CH3_PD14: J6.3 U1.61 | length 42.9
  Top Layer w0.2: U1.61 v2(1,12)
  Bottom Layer w0.2: J6.3 -12.42,25.42 v2(1,12)
STM_TIM4_CH4_PD15: J6.4 U1.62 | length 41
  Top Layer w0.2: U1.62 v2(0.5,11.5)
  Bottom Layer w0.2: J6.4 -10.88,22.88 v2(0.5,11.5)
STM_TIM5_CH1_PA0: J6.8 U1.23 | length 51.4
  Top Layer w0.2: U1.23 v2(5,-6.637)
  Bottom Layer w0.2: J6.8 -32,3.603 -21.76,-6.637 v2(5,-6.637)
STM_TIM5_CH2_PA1: J6.7 U1.24 | length 55
  Top Layer w0.2: U1.24 5.507,-7.693 5.507,-6.207 v2(5.514,-6.2)
  Bottom Layer w0.2: J6.7 -31.907,15.167 -30.867,15.167 -30.6,14.9 -30.6,2.769 -21.694,-6.137 5.319,-6.137 5.343,-6.162 5.476,-6.162 v2(5.514,-6.2)
STM_TIM5_CH3_PA2: J6.6 U1.25 | length 57.9
  Top Layer w0.2: U1.25 6.012,-7.688 6.012,-6.528 v2(6.025,-6.516)
  Bottom Layer w0.2: J6.6 -30.8,17.8 -30.2,17.2 -30.2,2.934 -21.566,-5.7 5.722,-5.7 6.014,-5.993 6.014,-6.505 v2(6.025,-6.516)
STM_TIM5_CH4_PA3: J6.5 U1.26 | length 60.2
  Top Layer w0.2: v2(6.512,-5.898) 6.566,-5.898 6.669,-6 U1.26
  Bottom Layer w0.2: J6.5 -30.74,20.34 -29.8,19.4 -29.8,3.1 -21.4,-5.3 5.914,-5.3 v2(6.512,-5.898)
STM_USART1_RX_PA10: J11.1 U1.69 | length 17.1
  Top Layer w0.2: U1.69 -3,13.8 3.6,20.4 J11.1
STM_USART1_TX_PA9: J11.8 U1.68 | length 28.3
  Top Layer w0.2: U1.68 -2.5,13.4 5.2,21.1 5.2,27.9 4.7,28.4 2.38,28.4 J11.8
STM_USART3_RX_PD9: J3.2 U1.56 | length 5.2
  Top Layer w0.2: U1.56 3.5,8.277 3.55,8.327 3.55,9.416 3.8,9.666 J3.2
STM_USART3_TX_PD8: J3.1 U1.55 | length 6.1
  Top Layer w0.2: U1.55 4,9.3 6.34,11.64 J3.1
STM_USB_DM_PA11: U1.70 U3.3 | length 29.5
  Top Layer w0.2: U1.70 -3.5,30.2 0.95,34.65 U3.3
STM_USB_DP_PA12: U1.71 U3.1 | length 28.9
  Top Layer w0.2: U1.71 -4,31.7 -1.005,34.695 -1.005,35.321 U3.1
STM_VCAP1: C17.2 U1.49 | length 4.9
  Top Layer w0.2: U1.49 10.3,5.5 11.061,6.261 C17.2
STM_VCAP2: C16.2 U1.73 | length 5
  Top Layer w0.2: C16.2 -5.969,11.43 -5,10.461 U1.73
TPS_BOOT: C1.2 U2.6 | length 1.6
  Top Layer w0.5: C1.2 24.772,45.284 26.348,45.284 U2.6
TPS_FB: C6.1 R2.1 R3.2 U2.4 | length 5
  Top Layer w0.2: C6.1 27.261,47.362 R2.1 ; U2.4 28.255,46.162 28.608,46.515 R2.1 ; R3.2 28.702,47.362 R2.1
TPS_SW: C1.1 L1.2 U2.2 | length 9.7
  Top Layer w0.5: C1.1 24.765,41.008 26.705,39.068 L1.2 U2.2
USB_CONN_N: J8.2 U3.4 | length 5.3
  Top Layer w0.3: U3.4 0.95,39.95 2.5,41.5 J8.2
USB_CONN_P: J8.3 U3.6 | length 8.1
  Top Layer w0.3: U3.6 -0.95,39.292 1.3,41.542 1.3,43.6 J8.3
pads on no net: J8.SH1 J8.SH2 J11.4 J12.8 U2.5

## Polygon pours and split planes (outlines as drawn)
GND on Bottom Layer "Bottom Layer-GND" (solid, pour order 0): -37,-26.587 -37,50.59 cw(c-36.587,50.59) -36.587,51.002 -36.59,51 42.586,51 cw(c42.586,50.587) 42.999,50.587 43,50.586 43,-26.589 cw(c42.587,-26.589) 42.587,-27.001 42.588,-27 -36.587,-27 cw(c-36.587,-26.587)
GND on Top Layer "Top Layer-GND" (solid, pour order 1): -37,-26.587 -37,50.59 cw(c-36.587,50.59) -36.587,51.002 -36.59,51 42.586,51 cw(c42.586,50.587) 42.999,50.587 43,50.586 43,-26.589 cw(c42.587,-26.589) 42.587,-27.001 42.588,-27 -36.587,-27 cw(c-36.587,-26.587)

## Silkscreen, mask and mechanical layers (free items; w line width, h text height)
Top Overlay:
  text "TIM4 CH1 PD12" at -30.384,30.211 h1
  text "TIM4 CH2 PD13" at -30.384,27.671 h1
  text "TIM4 CH3 PD14" at -30.384,25.131 h1
  text "TIM4 CH4 PD15" at -30.384,22.592 h1
  text "TIM5 CH4 PA3" at -30.384,20.051 h1
  text "TIM5 CH3 PA2" at -30.384,17.511 h1
  text "TIM5 CH2 PA1" at -30.384,14.971 h1
  text "U3 RX PD9" at 4.072,14.4 h1 r90
  text "U3 TX PD8" at 6.612,14.4 h1 r90
  text "TIM5 CH1 PA0" at -30.384,12.432 h1
  text "3V3" at -14.528,11.675 h1 r90
  text "GND" at -22.128,11.635 h1 r90
  text "CLK" at -19.608,11.622 h1 r90
  text "DIO" at -17.068,11.645 h1 r90
  text "IN9 PB1" at 25.616,6.207 h1
  text "NSS3 PA15" at -26.148,6 h1 r90
  text "SCLK3 PC10" at -23.608,6 h1 r90
  text "MISO3 PC11" at -21.068,6 h1 r90
  text "MOSI3 PC12" at -18.528,6 h1 r90
  text "IN8 PB0" at 25.616,3.672 h1
  text "IN15 PC5" at 25.616,1.132 h1
  text "IN14 PC4" at 25.616,-1.409 h1
  text "SCL1 PB6" at -19.728,-1.9 h1 r90
  text "SDA1 PB7" at -17.188,-1.9 h1 r90
  text "OUT2 PA5" at 16.232,-2.3 h1 r90
  text "OUT1 PA4" at 18.772,-2.3 h1 r90
  text "IN13 PC3" at 25.616,-3.949 h1
  text "IN12 PC2" at 25.616,-6.489 h1
  text "PCB v1.1" at 38.207,-6.638 h1.5 r90
  text "IN11 PC1" at 25.616,-9.029 h1
  text "IN10 PC0" at 25.616,-11.568 h1
  text "HOBOTS-A-COACH-405" at 36.244,-12.259 h2 r90
  text "СДЕЛАНО В РОССИИ" at 33.654,-15.152 h3 r90
  text "PB5" at -20.532,-18.36 h1 r90
  text "PB3" at -17.988,-18.36 h1 r90
  text "PD6" at -15.453,-18.36 h1 r90
  text "PB9" at -12.904,-18.36 h1 r90
  text "PE1" at -10.366,-18.36 h1 r90
  text "PE3" at -7.828,-18.36 h1 r90
  text "PE5" at -5.292,-18.36 h1 r90
  text "PC13" at -2.748,-18.36 h1 r90
  text "PC15" at -0.208,-18.36 h1 r90
  text "PA7" at 2.332,-18.36 h1 r90
  text "PE8" at 4.872,-18.36 h1 r90
  text "PE10" at 7.412,-18.36 h1 r90
  text "PE12" at 9.956,-18.36 h1 r90
  text "PE14" at 12.494,-18.36 h1 r90
  text "3V3" at 15.032,-18.36 h1 r90
  text "3V3" at 17.572,-18.36 h1 r90
  text "BUS" at 20.112,-18.36 h1 r90
  text "EXT" at 22.652,-18.36 h1 r90
  text "GND" at 25.192,-18.36 h1 r90
  text "GND" at 27.732,-18.36 h1 r90
  text "PB8" at -15.428,-25.407 h1 r90
  text "PE2" at -10.344,-25.404 h1 r90
  text "PE9" at 4.896,-25.406 h1 r90
  text "3V3" at 15.052,-25.404 h1 r90
  text "BUS" at 20.132,-25.409 h1 r90
  text "PB4" at -20.508,-25.432 h1 r90
  text "PD7" at -17.988,-25.425 h1 r90
  text "PE6" at -5.273,-25.418 h1 r90
  text "PA6" at -0.193,-25.418 h1 r90
  text "PE7" at 2.332,-25.425 h1 r90
  text "3V3" at 17.572,-25.425 h1 r90
  text "EXT" at 22.652,-25.418 h1 r90
  text "PE0" at -12.908,-25.449 h1 r90
  text "PE4" at -7.828,-25.454 h1 r90
  text "GND" at 25.212,-25.465 h1 r90
  text "GND" at 27.732,-25.486 h1 r90
  text "PE13" at 9.972,-25.874 h1 r90
  text "PE15" at 12.489,-25.89 h1 r90
  text "PE11" at 7.414,-25.896 h1 r90
  text "PC14" at -2.748,-25.922 h1 r90
Board:
  lines w0.1: -36.59,51 42.586,51 cw(c42.586,50.587) 42.999,50.587 ; -36.587,51.002 ccw(c-36.587,50.59) -37,50.59 -37,-26.587 ccw(c-36.587,-26.587) -36.587,-27 42.588,-27 ; 42.587,-27.001 ccw(c42.587,-26.589) 43,-26.589 43,50.586

## Text inside footprints (layer, text, board x,y; h text height)
G1: Top Layer "MES GROUP" at -31.139,-15.947 h3 r90; Top Solder "MES GROUP" at -31.139,-15.947 h3 r90